# Altium PCB PCB_Button_Board.PcbDoc
Units mil, origin at the board's own origin, x right, y up, seen from the top; angles counter-clockwise.
Board outline 1417.32 x 1023.62 mil, 2 copper layers (Top Layer, Bottom Layer), stack 61.811 mil thick; 41 components, 29 nets, 125 pads, 0 vias.
Unrouted connection lines stored in the file: 87.
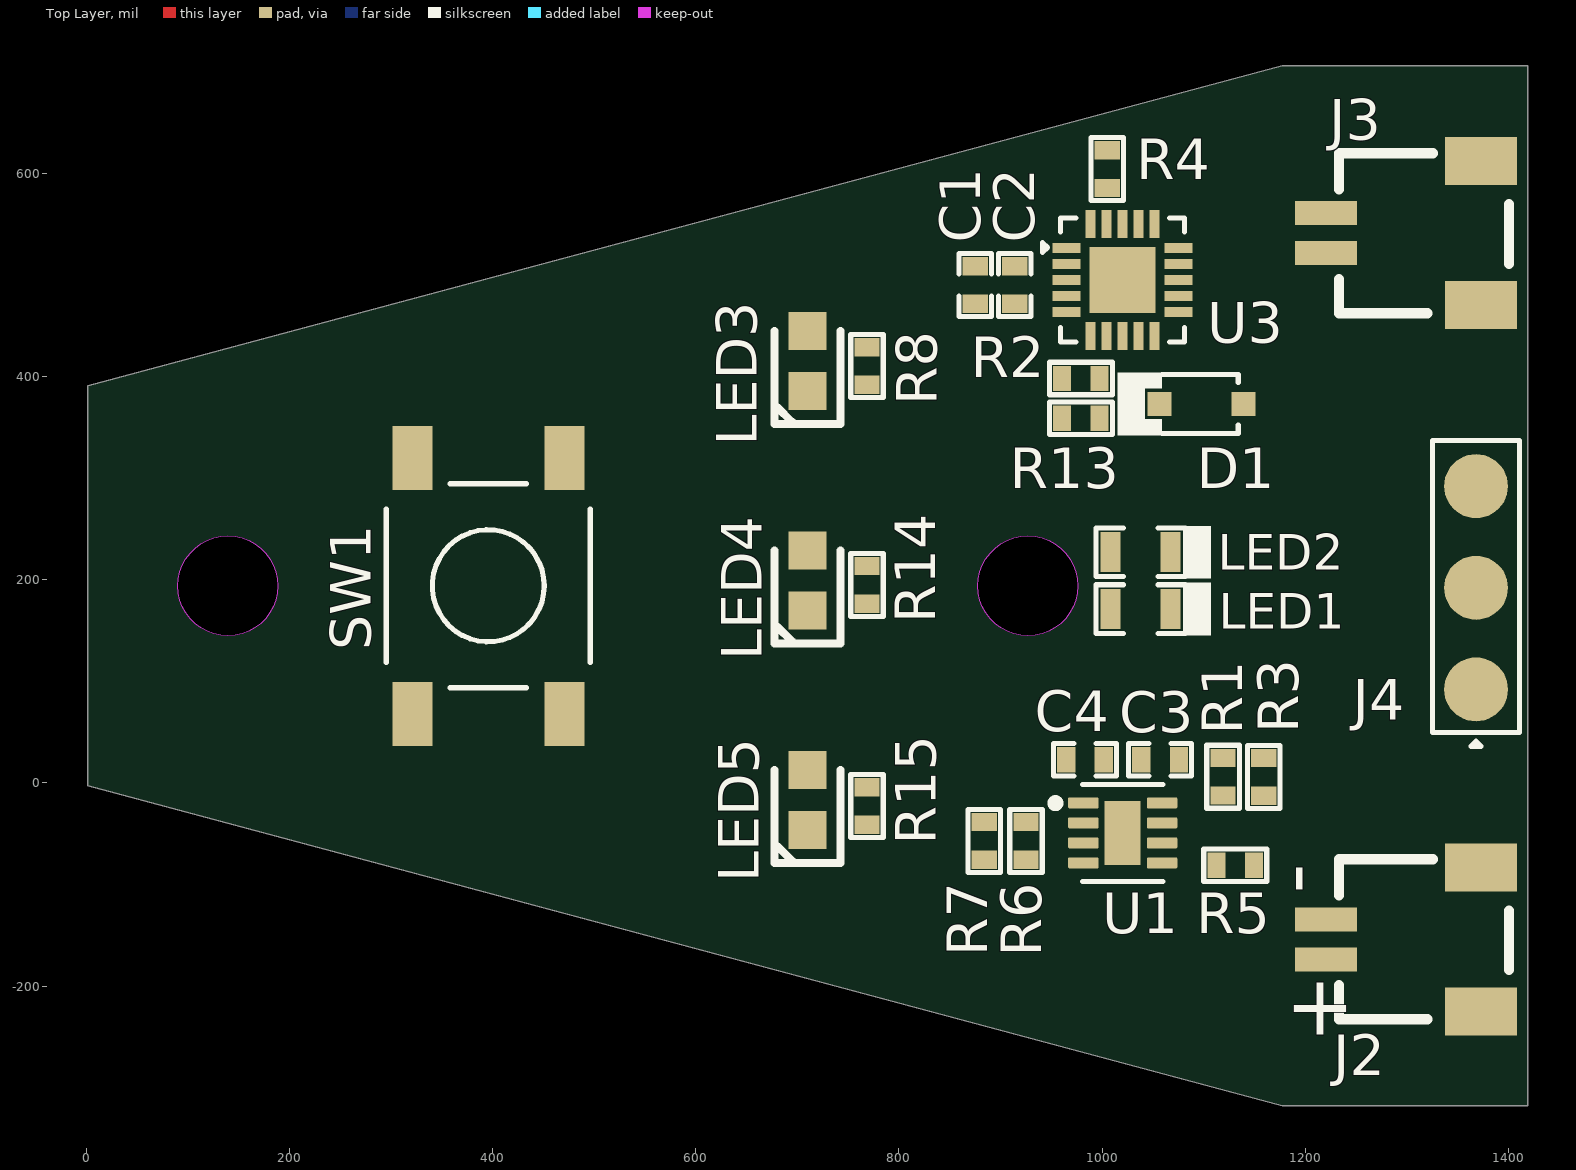
[diagram p0: Top Layer view]
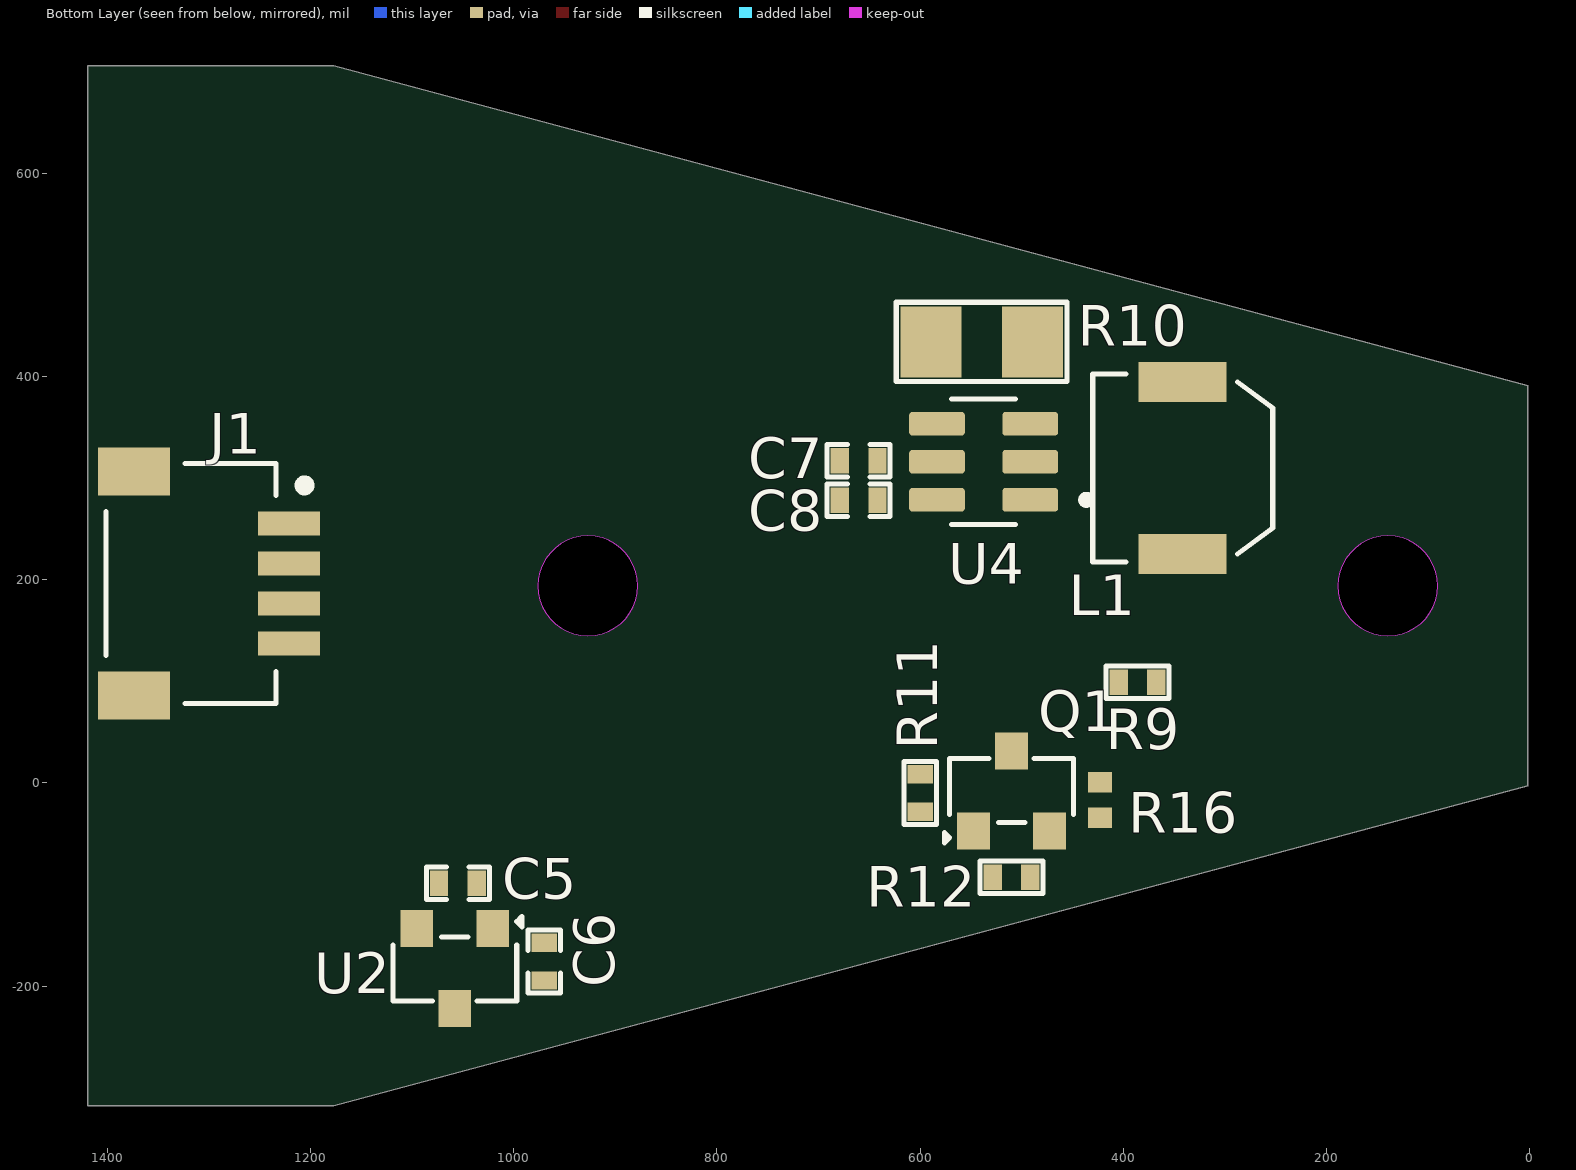
[diagram p1: Bottom Layer view, seen from below]

## Layer stack, top to bottom
Top Solder: solder mask 0.3937, Solder Resist, Dk 3.5
Top Layer: signal copper 1.378
Dielectric 1: core 59.0551, FR-4, Dk 4.8
Bottom Layer: signal copper 1.378
Bottom Solder: solder mask 0.3937, Solder Resist, Dk 3.5

## Board outline
1.76,-3.03 1177.21,-317.99 1419.08,-317.99 1419.08,705.63 1177.21,705.63 1.76,390.67
cut-out: 139.55,144.61 cw(c139.55,193.82) 90.34,193.82 cw(c139.55,193.82) 139.55,243.03 cw(c139.55,193.82) 188.77,193.82 cw(c139.55,193.82)
cut-out: 926.96,144.61 cw(c926.96,193.82) 877.74,193.82 cw(c926.96,193.82) 926.96,243.03 cw(c926.96,193.82) 976.17,193.82 cw(c926.96,193.82)

## Design rules (kind name [scope] priority, off if disabled: settings)
Clearance [All] p1: gap=7 ignorepadtopadclearanceinfootprint=FALSE except(4: Arc-SMDPad Track-SMDPad SMDPad-SMDPad)
HoleSize [All] p1: absolutevalues=TRUE maxlimit=1000 minlimit=1 maxpercent=80.000 minpercent=20.000
HoleToHoleClearance [All] p1: gap=2 allowstackedmicrovias=TRUE
MinimumSolderMaskSliver [All] p1: minsoldermaskwidth=2
PolygonConnect [All] p1: connectstyle=Relief reliefconductorwidth=10 reliefentries=4 polygonreliefangle="90 Angle" airgapwidth=10
RoutingVias [All] p1: holewidth=11.81 width=23.62 viastyle="Through Hole" minholewidth=11.81 minwidth=23.62 maxholewidth=11.81 maxwidth=23.62
SilkToSilkClearance [All] p1: silktosilkclearance=2
SilkToSolderMaskClearance [IsPad] p1: minsilkscreentomaskgap=2 clearancetoexposedcopper=TRUE
SolderMaskExpansion [All] p1: expansion=4 istentingtop=FALSE
Width [All] p1: maxlimit=100 minlimit=10 preferedwidth=12 minimp=50.000000 maximp=50.000000 favimp=50.000000
25 further rules are at their usual default settings.

## Classes and differential pairs
component class U_Power-Sheet: C3 C4 C5 C6 LED1 LED2 R1 R3 R5 R6 R7 U1 U2
component class U_LED-Driver-Sheet: C7 C8 L1 Q1 R9 R10 R11 R12 R16 SW1 U4
component class U_Controller-Sheet: C1 C2 D1 J4 LED3 LED4 LED5 R2 R4 R8 R13 R14 R15 U3
component class U_Connector-Sheet: J1 J2 J3

## Components (designator, comment, footprint, x,y, rotation, side; value= is the part's Value field where it differs from the comment)
C1 "1uF" Cap-0402 875,490 r270 top locked
C2 "0.1uF" Cap-0402 914,490 r270 top locked
C3 "1uF" Cap-0402 1057.06,22.87 r0 top locked
C4 "1uF" Cap-0402 983.06,22.87 r180 top locked
C5 "1uF" Cap-0402 1055,-99 r0 bottom locked
C6 "0.1uF" Cap-0402 970,-176 r270 bottom locked
C7 "0.22uF" Cap-0402 660.5,317 r180 bottom locked
C8 "1uF" Cap-0402 660.5,278 r180 bottom locked
D1 "MM3Z3V3B" SOD323F 1098,373 r180 top locked
J1 "SM04B-SRSS-TB" JST_SM04B-SRSS-TB(LF)(SN) 1221,196.32 r270 bottom
J2 "SM02B-SRSS-TB(LF)(SN)" SM02B-SRSS-TB(LF)(SN) 1298,-154 r90 top locked
J3 "SM02B-SRSS-TB(LF)(SN)" SM02B-SRSS-TB(LF)(SN) 1298,541 r90 top locked
J4 "3 Pin POGO" "3 Pin POGO" 1368,192 r90 top locked
L1 "22uH" IND_1235AS-H-220M=P3 341.5,310 r270 bottom locked
LED1 "RED" LED-0603 1038,171 r0 top locked
LED2 "Emerald" LED-0603 1038,227 r0 top locked
LED3 "GREEN" 150060GS75000 710,415 r90 top locked
LED4 "GREEN" 150060GS75000 710,199 r90 top locked
LED5 "GREEN" 150060GS75000 710,-17 r90 top locked
Q1 "FDN335N" SOT-23 510,-8 r180 bottom locked
R1 "10K" Res-0402 1119,6 r270 top locked
R2 "27K" Res-0402 979,398 r0 top locked
R3 "10K" Res-0402 1159.06,5.87 r270 top locked
R4 "4.7K" Res-0402 1005,604 r90 top locked
R5 "27K" Res-0402 1131,-81 r180 top locked
R6 "750R" Res-0402 925.06,-57.13 r90 top locked
R7 "10K" Res-0402 884.06,-57.13 r90 top locked
R8 "100R" Res-0402 768.57,410.35 r270 top locked
R9 "10K" Res-0402 386,99 r180 bottom locked
R10 "0.4R" Res-1206 539.5,434 r180 bottom locked
R11 "1K" Res-0402 600,-10 r270 bottom locked
R12 "10K" Res-0402 510,-93 r180 bottom locked
R13 "7.68K" Res-0402 979,359 r180 top locked
R14 "100R" Res-0402 768.57,194.85 r270 top locked
R15 "100R" Res-0402 768.57,-22.72 r270 top locked
R16 "20R" RESC1005X40N 423,-17 r270 bottom locked
SW1 "PTS526 SK15 SMTR2 LFS" PTS525SM15SMTR2LFS 395.8,193.98 r90 top locked
U1 "BQ25170DSGR" BQ25170DSGR 1020.28,-49.28 r0 top locked
U2 "MCP1700T-3302E/TT" SOT-23 1058,-182.63 r0 bottom locked
U3 "ATTINY1616-MNR" "20-VQFN (3x3)" 1020.12,495 r0 top locked
U4 "AP3019AKTR-G1" AP3019AKTR-G1 537.5,316 r0 bottom locked

## Footprints (in the part's own frame and the unit in brackets; to place one, negate y for a bottom-side part, rotate by r counter-clockwise, add the part's x,y. Pads: shape width x height; smd on the part's side, far side on the other; paste and mask are expansions set on the pad)
"3 Pin POGO" [mm] "Connector; Header; 3 Position"
  round 1.6 smd: 1(-2.54,0) 2(0,0) 3(2.54,0)
  silkscreen extent -3.96,-1.09 3.68,1.09
"20-VQFN (3x3)" [mm]
  rect 0.7x0.25 smd: 1(-1.4,0.8) 2(-1.4,0.4) 3(-1.4,0) 4(-1.4,-0.4) 5(-1.4,-0.8) 11(1.4,-0.8) 12(1.4,-0.4) 13(1.4,0) 14(1.4,0.4) 15(1.4,0.8)
  rect 0.25x0.7 smd: 6(-0.8,-1.4) 7(-0.4,-1.4) 8(0,-1.4) 9(0.4,-1.4) 10(0.8,-1.4) 16(0.8,1.4) 17(0.4,1.4) 18(0,1.4) 19(-0.4,1.4) 20(-0.8,1.4)
  rect 1.65x1.65 smd: 21(0,0)
  silkscreen extent -2.01,-1.55 1.55,1.55, body extent -1.5,-1.5 1.5,1.5, height 0.59
150060GS75000 [mm]
  rect 0.95x0.95 smd: 1(-0.75,0) 2(0.75,0)
  silkscreen extent -1.58,-0.82 0.75,0.82, body extent -0.8,-0.4 0.8,0.4, height 0.81
AP3019AKTR-G1 [mm]
  rrect25% 1.39x0.59 smd: 1(-1.165,0.95) 2(-1.165,0) 3(-1.165,-0.95) 4(1.165,-0.95) 5(1.165,0) 6(1.165,0.95)
  silkscreen extent -2.66,-1.57 0.8,1.57, body extent -1.37,-1.49 1.48,1.51, height 1.31
BQ25170DSGR [mm]
  rrect25% 0.76x0.28 smd: 1(-0.985,0.75) 2(-0.985,0.25) 3(-0.985,-0.25) 4(-0.985,-0.75) 5(0.985,-0.75) 6(0.985,-0.25) 7(0.985,0.25) 8(0.985,0.75)
  rect 0.9x1.6 smd paste-2: 9(0,0)
  silkscreen extent -1.78,-1.21 1,1.21, body extent -1,-1 1,1, height 0.8
Cap-0402 [mil]
  rect 18x25 smd mask+2.36: 1(-18.5,0) 2(18.5,0)
  silkscreen extent -31,-16 31,16, body extent -20,-10 20,10, height 19
IND_1235AS-H-220M=P3 [mm]
  rect 1x2.2 smd: 1(-2.15,0) 2(2.15,0)
  silkscreen extent -2.35,-2.25 2.35,2.25, body extent -2.35,-2.29 2.35,2.21, height 1.79
JST_SM04B-SRSS-TB(LF)(SN) [mm]
  rect 0.6x1.55 smd: 1(-1.5,0) 2(-0.5,0) 3(0.5,0) 4(1.5,0)
  rect 1.2x1.8 smd: S1(-2.8,-3.875) S2(2.8,-3.875)
  silkscreen extent -3,-4.57 3,0.48, body extent -2.92,-4.57 3.08,0.38, height 2.91
LED-0603 [mm]
  rect 0.5x1 smd: 1(-0.75,0) 2(0.75,0)
  silkscreen extent -1.12,-0.66 1.75,0.66, body extent -0.82,-0.37 0.82,0.36, height 0.68
PTS525SM15SMTR2LFS [mm]
  rect 1.6x1 smd: 1(-3.2,1.9) 2(3.2,1.9) 3(-3.2,-1.9) 4(3.2,-1.9)
  silkscreen extent -2.55,-2.55 2.55,2.55, body extent -3.2,-2.55 3.2,2.55, height 1.6
Res-0402 [mil]
  rect 18x25 smd mask+2.17: 1(-18.5,0) 2(18.5,0)
  silkscreen extent -32,-17 32,16, body extent -23,-11 23,11, height 16
Res-1206 [mil]
  rect 60x70 smd: 1(-50,0) 2(50,0)
  silkscreen extent -84,-39 84,39, body extent -63,-31 63,31, height 24
RESC1005X40N [mm]
  rect 0.51x0.6 smd: 1(-0.445,0) 2(0.445,0)
  body extent -0.5,-0.25 0.5,0.25, height 0.41
SM02B-SRSS-TB(LF)(SN) [mm]
  rect 0.6x1.55 smd: 1(-0.5,1.975) 2(0.5,1.975)
  rect 1.2x1.8 smd: 3(-1.8,-1.9) 4(1.8,-1.9)
  silkscreen extent -2,-2.6 2,1.65, body extent -2,-2.73 2,2.22, height 2.91
SOD323F [mm]
  rect 0.6x0.6 smd: 1(-1.05,0) 2(1.05,0)
  silkscreen extent -0.91,-0.79 2.11,0.79, body extent -1.25,-0.68 1.25,0.68, height 1
SOT-23 [mm] "TRANS NPN 40V 0.6A SOT23"
  rect 0.82x0.92 smd: 1(-0.95,-1) 2(0.95,-1) 3(0,1)
  silkscreen extent -1.68,-1.3 1.55,0.81, body extent -1.5,-1.25 1.5,1.25, height 1.05

## Part data
C1 C3 C4 C5 C8: library part GRM033R60J105MEA2D, "1 µF ±20% 6.3V Ceramic Capacitor X5R 0201 (0603 Metric)", Digikey Part Number=490-7229-6-ND, Manufacturer="Murata Electronics", Package=0201, ComponentLink1Description="Digikey Link", ComponentLink1URL=https://www.digikey.com/en/products/detail/murata-electronics/GRM033R60J105MEA2D/4213369, Item Type=Capacitor, Manufacturer Part Number=GRM033R60J105MEA2D
C2 C6: library part GRM155R71C104KA88J, "0.1 µF ±10% 16V Ceramic Capacitor X7R 0402 (1005 Metric)", Digikey Part Number=490-6328-6-ND, Manufacturer="Murata Electronics", Package=0402, ComponentLink1Description="Digikey Link", ComponentLink1URL=https://www.digikey.com/en/products/detail/murata-electronics/GRM155R71C104KA88J/2610892, Item Type=Capacitor, Manufacturer Part Number=GRM155R71C104KA88J
C7: library part CC0402KRX5R8BB224, "0.22 µF ±10% 25V Ceramic Capacitor X5R 0402 (1005 Metric)", Digikey Part Number=311-3341-6-ND, Manufacturer=YAGEO, Package=0402, ComponentLink1Description="Digikey Link", ComponentLink1URL=https://www.digikey.com/en/products/detail/yageo/CC0402KRX5R8BB224/5883337?s=N4IgTCBcDaIMJwAwBZFgNICUAaBWTAHAEJFhjIgC6AvkA, Item Type=Capacitor, Manufacturer Part Number=CC0402KRX5R8BB224
D1: "DIODE ZENER 3.3V 200MW SOD323F", Digikey Part Number=MM3Z3V3BDKR-ND, Forward Voltage=1V, Manufacturer="ON Semiconductor / Fairchild", Max Operating Temperature=150°C, Max Power Dissipation=200mW, Max Reverse Leakage Current=4.5uA, Min Operating Temperature=-65°C, Package Quantity=1, Supplier Part Number 1=MM3Z3V3BCT-ND, Test Current=5mA, Tolerance=2%, Working Voltage=3.3V, ComponentLink1Description=http://www.onsemi.com/pub/Collateral/MM3Z9V1B-D.pdf?src-supplier=Digi-Key, ComponentLink1URL=http://www.onsemi.com/pub/Collateral/MM3Z9V1B-D.pdf?src-supplier=Digi-Key, ComponentLink2Description=http://www.mouser.com/ds/2/149/MM3Z3V3B-187166.pdf?src-supplier=Mouser, ComponentLink2URL=http://www.mouser.com/ds/2/149/MM3Z3V3B-187166.pdf?src-supplier=Mouser, ComponentLink3Description=https://www.fairchildsemi.com/datasheets/MM/MM3Z9V1B.pdf?src-supplier=Avnet, ComponentLink3URL=https://www.fairchildsemi.com/datasheets/MM/MM3Z9V1B.pdf?src-supplier=Avnet, ComponentLink4Description=http://www.farnell.com/datasheets/1706525.pdf?src-supplier=Element14, ComponentLink4URL=http://www.farnell.com/datasheets/1706525.pdf?src-supplier=Element14, ComponentLink5Description="Digikey Link", ComponentLink5URL=https://www.digikey.com/en/products/detail/onsemi/MM3Z3V3B/1626765?s=N4IgTCBcDaILJwMwC1EDVECEQF0C%2BQA, Element Configuration=Single, Height=1mm, Impedance=89R, Item Type=Diode, Lead Free="Lead Free", Length=1.3mm, Manufacturer Part Number=MM3Z3V3B, Mount="Surface Mount", Number of Pins=2, Packaging="Tape and Reel", Peak Reverse Current=4.5uA, Power Dissipation=200mW, Pricing 1="1=0.22, 10=0.18, 100=0.0956, 500=0.06288, 1000=0.04276 (USD)", Radiation Hardening=No, REACH SVHC="No SVHC", Stock 1=473644, Supplier 1=Digi-Key, Voltage Tolerance=2%, Weight=0.0276g, Width=1.7mm, Zener Voltage=3.3V
J1: "Connector Header Surface Mount, Right Angle 4 position 0.039\" (1.00mm)", Digikey Part Number=455-SM04B-SRSS-TBDKR-ND, Manufacturer="JST Sales America Inc.", Package=SMD, ComponentLink1Description="Digikey Link", ComponentLink1URL=https://www.digikey.com/en/products/detail/jst-sales-america-inc/SM04B-SRSS-TB/926710, Item Type=Connector, Manufacturer Part Number=SM04B-SRSS-TB
J2 J3: "Connector Header Surface Mount, Right Angle 2 position 0.039 _1.00mm_", Digikey Part Number=455-SM02B-SRSS-TBDKR-ND, Manufacturer="JST Sales", Manufacturer Part Number=SM02B-SRSS-TB_LF__SN_, Package=None, Availability=Unavailable, ComponentLink1Description="Digikey Link", ComponentLink1URL=https://www.digikey.com/en/products/detail/jst-sales-america-inc/SM02B-SRSS-TB/926708?s=N4IgTCBcDaIMoFkAMYBCBaOAlOd0BVUQBdAXyA, Price=None, SnapEDA_Link=https://www.snapeda.com/parts/SM02B-SRSS-TB%28LF%29%28SN%29/JST%20Sales%20America%20Inc./view-part/447499/?ref=snap
J4: library part 68000-103HLF, "CONN HEADER VERT 3POS 2.54MM", Current Rating=3A, Digikey Part Number=609-3461-ND, Flammability Rating="UL94 V-0", Housing Color=Black, Insulation Resistance=5GR, LCSC Part Number=C168677, Max Operating Temperature=125°C, Max Voltage Rating (AC)=1.5kV, Min Operating Temperature=-65°C, Package Quantity=100, Supplier Part Number=88K1775, Category="Headers and Wire Housings", ComponentLink1Description=LCSC, ComponentLink2Description=https://datasheet.ciiva.com/46392/1914865-46392021.pdf?src-supplier=Element14, ComponentLink2URL=https://datasheet.ciiva.com/46392/1914865-46392021.pdf?src-supplier=Element14, ComponentLink3Description="Digikey Link", ComponentLink3URL=https://www.digikey.com/en/products/detail/amphenol-cs-fci/68000-103HLF/2023309?s=N4IgTCBcDaIGwA4AMKC0BGJBmAEgGQDEQBdAXyA, Contact Gender=Male, Contact Material=Bronze, Contact Mating Length=5.84mm, Contact Plating=Gold,GXT, Contact Post Length=2.41mm, Depth=2.41mm, Housing Material=Thermoplastic, Item Type="Male Header", Length=7.62mm, Manufacturer Part Number=68000-103HLF, Number of Contacts=3, Number of Positions=3, Number of Rows=1, Orientation=Straight, Packaging=Bulk, Pitch=2.54mm, Pricing="1=0.395, 10=0.31, 25=0.29, 50=0.27, 100=0.25 (USD)", Radiation Hardening=No, Reach SVHC Compliant=No, RoHS=No, Series=68000, Stock=2805, Supplier=Avnet, Termination="Through Hole", Voltage Rating=1.5kV
L1: library part 1235AS-H-220M=P3, "Inductor Power Shielded Wirewound 22uH 20% 100KHz Ferrite 1A 0.306Ohm DCR 1818 T/R", Digikey Part Number=490-14209-6-ND, Manufacturer="Murata Electronics", Manufacturer Part Number=1235AS-H-220M=P3, Package=None, ComponentLink1Description="Digikey Link", ComponentLink1URL=https://www.digikey.com/en/products/detail/murata-electronics/1235AS-H-220M-P3/6205726, Item Type=Inductor
LED1: library part NCD0603R3, "RED LED 0603 Light Emitting Diodes", LCSC Part Number=C3151730, Manufacturer="Foshan NationStar Optoelectronics", Package=0603, ComponentLink1Description=LCSC, ComponentLink1URL=https://www.lcsc.com/product-detail/Light-Emitting-Diodes-LED_Foshan-NationStar-Optoelectronics-NCD0603R3_C3151730.html, Item Type=LED, Manufacturer Part Number=NCD0603R3
LED2: library part NCD0603G2, "Emerald 0603 Light Emitting Diodes (LED) ROHS", LCSC Part Number=C87326, Manufacturer="Foshan NationStar Optoelectronics", Package=0603, ComponentLink1Description=LCSC, ComponentLink1URL=https://www.lcsc.com/product-detail/Light-Emitting-Diodes-LED_Foshan-NationStar-Optoelectronics-NCD0603G2_C87326.html, Item Type=LED, Manufacturer Part Number=NCD0603G2
LED3 LED4 LED5: library part 150060GS75000, "Green 520nm LED Indication - Discrete 3.2V 0603 (1608 Metric)", Digikey Part Number=732-4971-6-ND, Manufacturer="Würth Elektronik", Package=0603, ComponentLink1Description="Digikey Link", ComponentLink1URL=https://www.digikey.com/en/products/detail/w%C3%BCrth-elektronik/150060GS75000/4489898, Item Type=LED, Manufacturer Part Number=150060GS75000, Supplier Part Number=732-4971-6-ND
Q1: "SOT-23 MOSFETs ROHS", Digikey Part Number=FDN335NDKR-ND, Manufacturer=onsemi, Package=SOT-23, ComponentLink1Description="Digikey Link", ComponentLink1URL=https://www.digikey.com/en/products/detail/onsemi/FDN335N/965301, Item Type=Mosfet, Manufacturer Part Number=FDN335N
R1 R3 R7 R9 R12: library part RC0603FR-0710KL, "10 kOhms ±1% 0.063W, 1/16W Chip Resistor 0402 (1005 Metric) Moisture Resistant Thick Film", Digikey Part Number=311-10.0KLRDKR-ND, Manufacturer=YAGEO, Manufacturer Part Number=RC0402FR-0710KL, Package=0402, ComponentLink1Description="Digikey Link", ComponentLink1URL=https://www.digikey.com/en/products/detail/yageo/RC0402FR-0710KL/726523, Item Type=Resistor
R2 R5: library part RC0402FR-0727KL, "27 kOhms ±1% 0.063W, 1/16W Chip Resistor 0402 (1005 Metric) Moisture Resistant Thick Film", Digikey Part Number=311-27.0KLRDKR-ND, Manufacturer=YAGEO, Package=0402, ComponentLink1Description="New link", Item Type=Resistor, Manufacturer Part Number=RC0402FR-0727KL
R4: library part RC0402FR-074K7L, "4.7 kOhms ±1% 0.063W, 1/16W Chip Resistor 0402 (1005 Metric) Moisture Resistant Thick Film", Digikey Part Number=311-4.7KLRDKR-ND, Manufacturer=YAGEO, Package=0402, ComponentLink1Description="Digikey Link", ComponentLink1URL=https://www.digikey.com/en/products/detail/yageo/RC0402FR-074K7L/2827563, Item Type=Resistor, Manufacturer Part Number=RC0402FR-074K7L
R6: library part CRCW0201750RFKED, "750 Ohms ±5% 0.063W, 1/16W Chip Resistor 0402 (1005 Metric) Moisture Resistant Thick Film", Digikey Part Number=YAG3314DKR-ND, Manufacturer=YAGEO, Manufacturer Part Number=RC0402JR-07750RL, Package=0402, ComponentLink1Description="Digikey Link", ComponentLink1URL=https://www.lcsc.com/product-detail/Chip-Resistor-Surface-Mount_Vishay-Intertech-CRCW0201750RFKED_C2086853.html, Item Type=Resistor
R8 R14 R15: library part RC0402FR-07100RL, "100 Ohms ±1% 0.063W, 1/16W Chip Resistor 0402 (1005 Metric) Moisture Resistant Thick Film", Digikey Part Number=311-100LRDKR-ND, Manufacturer=YAGEO, Package=0402, ComponentLink1Description="Digikey Link", ComponentLink1URL=https://www.digikey.com/en/products/detail/yageo/RC0402FR-07100RL/726527, Item Type=Resistor, Manufacturer Part Number=RC0402FR-07100RL
R10: library part RL1206FR-070R4L, "400 mOhms ±1% 0.25W, 1/4W Chip Resistor 1206 (3216 Metric) Automotive AEC-Q200, Current Sense, Moisture Resistant Thick Film", Digikey Part Number=311-.4LWDKR-ND, Manufacturer=YAGEO, Package=1206, ComponentLink1Description="Digikey Link", ComponentLink1URL=https://www.digikey.com/en/products/detail/yageo/RL1206FR-070R4L/3886028, Item Type=Resistor, Manufacturer Part Number=RL1206FR-070R4L
R11: library part RC0402FR-071KL, "1 kOhms ±1% 0.063W, 1/16W Chip Resistor 0402 (1005 Metric) Moisture Resistant Thick Film", Digikey Part Number=311-1.00KLRDKR-ND, Manufacturer=YAGEO, Package=0402, ComponentLink1Description="Digikey Link", ComponentLink1URL=https://www.digikey.com/en/products/detail/yageo/RC0402FR-071KL/726513, Item Type=Resistor, Manufacturer Part Number=RC0402FR-071KL
R13: library part AC0402FR-077K68L, "7.68 kOhms ±1% 0.063W, 1/16W Chip Resistor 0402 (1005 Metric) Automotive AEC-Q200, Moisture Resistant Thick Film", Digikey Part Number=YAG5688DKR-ND, Manufacturer=YAGEO, Package=0402, ComponentLink1Description="New link", Item Type=Resistor, Manufacturer Part Number=AC0402FR-077K68L
R16: library part RCS040220R0FKED, "20 Ohms ±1% 0.2W, 1/5W Chip Resistor 0402 (1005 Metric) Automotive AEC-Q200, Pulse Withstanding Thick Film", Digikey Part Number=541-RCS040220R0FKEDDKR-ND, Manufacturer="Vishay Dale", Package=0402, ComponentLink1Description="Digikey Link", ComponentLink1URL=https://www.digikey.com/en/products/detail/vishay-dale/RCS040220R0FKED/5867510, Item Type=Resistor, Manufacturer Part Number=RCS040220R0FKED
SW1: library part MCSLPT4644B1PHTR, "Tactile Switch SPST-NO Top Actuated Surface Mount", Digikey Part Number=450-3383-6-ND, Manufacturer="TE Connectivity ALCOSWITCH Switches", Package=SMD, ComponentLink1Description="Digikey Link", ComponentLink1URL=https://www.digikey.com/en/products/detail/te-connectivity-alcoswitch-switches/MCSLPT4644B1PHTR/9686564, Item Type=Switch, Manufacturer Part Number=MCSLPT4644B1PHTR
U1: "Charger IC Multi-Chemistry 8-WSON (2x2)", Digikey Part Number=296-BQ25170DSGRDKR-ND, Manufacturer="Texas Instruments", Package="8-WFDFN Exposed Pad", ComponentLink1Description="Digikey Link", ComponentLink1URL=https://www.digikey.com/en/products/detail/texas-instruments/BQ25170DSGR/14124032, Item Type="BATTERY CHARGER", Manufacturer Part Number=BQ25170DSGR
U2: "IC REG LDO 3.3V 0.25A SOT23-3", Case/Package=SOT-23, Digikey Part Number=MCP1700T3302ETTDKR-ND, Dropout Voltage=178mV, Input Bias Current=1.6uA, Manufacturer=Microchip, Max Input Voltage=6V, Max Operating Temperature=125°C, Max Output Current=250mA, Max Output Voltage=3.3V, Max Power Dissipation=369.6mW, Min Input Voltage=2.3V, Min Operating Temperature=-40°C, Nominal Supply Current=4uA, Output Voltage Accuracy=2%, Package Quantity=3000, Supplier Part Number 1=MCP1700T3302ETTCT-ND, Accuracy=2%, Category="Voltage Regulators - Linear", ComponentLink1Description=https://datasheet.ciiva.com/5801/1784514-5801824.pdf?src-supplier=Farnell, ComponentLink1URL=https://datasheet.ciiva.com/5801/1784514-5801824.pdf?src-supplier=Farnell, ComponentLink2Description=https://datasheet.ciiva.com/2040/21826b-2040112.pdf?src-supplier=Digi-Key, ComponentLink2URL=https://datasheet.ciiva.com/2040/21826b-2040112.pdf?src-supplier=Digi-Key, ComponentLink3Description=https://datasheet.ciiva.com/7649/1784514-7649813.pdf?src-supplier=Element14, ComponentLink3URL=https://datasheet.ciiva.com/7649/1784514-7649813.pdf?src-supplier=Element14, ComponentLink4Description=https://datasheet.ciiva.com/22710/1784514-22710988.pdf?src-supplier=Element14, ComponentLink4URL=https://datasheet.ciiva.com/22710/1784514-22710988.pdf?src-supplier=Element14, ComponentLink5Description=https://datasheet.ciiva.com/14150/mcp1700-eng-tds-14150122.pdf?src-supplier=Distrelec, ComponentLink5URL=https://datasheet.ciiva.com/14150/mcp1700-eng-tds-14150122.pdf?src-supplier=Distrelec, ComponentLink6Description=https://datasheet.ciiva.com/8041/1784514-8041598.pdf?src-supplier=Element14, ComponentLink6URL=https://datasheet.ciiva.com/8041/1784514-8041598.pdf?src-supplier=Element14, ComponentLink7Description=https://datasheet.ciiva.com/3224/jp011779-3224133.pdf?src-supplier=Avnet, ComponentLink7URL=https://datasheet.ciiva.com/3224/jp011779-3224133.pdf?src-supplier=Avnet, ComponentLink8Description=https://datasheet.ciiva.com/16208/filehandler-aspxddocname-en011779-16208911.pdf?src-supplier=Future+Electronics, ComponentLink8URL=https://datasheet.ciiva.com/16208/filehandler-aspxddocname-en011779-16208911.pdf?src-supplier=Future+Electronics, ComponentLink9Description=https://datasheet.ciiva.com/15200/getdatasheetpartid-453599-15200229.pdf?src-supplier=Verical, ComponentLink9URL=https://datasheet.ciiva.com/15200/getdatasheetpartid-453599-15200229.pdf?src-supplier=Verical, ComponentLink10Description=https://datasheet.ciiva.com/2040/21826b-2040113.pdf?src-supplier=Digi-Key, ComponentLink10URL=https://datasheet.ciiva.com/2040/21826b-2040113.pdf?src-supplier=Digi-Key, ComponentLink11Description=https://datasheet.ciiva.com/2040/21826b-2040114.pdf?src-supplier=Digi-Key, ComponentLink11URL=https://datasheet.ciiva.com/2040/21826b-2040114.pdf?src-supplier=Digi-Key, ComponentLink12Description=https://datasheet.ciiva.com/29305/651414-da-01-en-ic-reg-ld-mcp1700t-3302e-tt-sot-23-3-mcp-29305258.pdf?src-supplier=Conrad, ComponentLink12URL=https://datasheet.ciiva.com/29305/651414-da-01-en-ic-reg-ld-mcp1700t-3302e-tt-sot-23-3-mcp-29305258.pdf?src-supplier=Conrad, Contact Plating=Tin,Matte, Height=0.95mm, Item Type=IC, Lead Free="Lead Free", Length=2.9mm, Manufacturer Part Number=MCP1700T-3302E/TT, Max Supply Voltage=6V, Min Output Voltage=3.3V, Min Supply Voltage=2.3V, Mount="Surface Mount", Nominal Output Voltage=3.3V, Number of Outputs=1, Number of Pins=3, Output Current=250mA, Output Type=Fixed, Output Voltage=3.3V, Packaging="Tape and Reel", Polarity=Positive, Power Dissipation=369.6mW, Pricing 1="1=0.50000, 25=0.42400, 100=0.37500 (USD)", Quiescent Current=4uA, Radiation Hardening=No, Reach SVHC Compliant="No SVHC", RoHS=Yes, RoHS Compliant=Yes, Stock 1=230029, Supplier 1=Digi-Key, Supply Current=4uA, Termination=SMD/SMT, Width=1.3mm
U3: "AVR tinyAVR™ 1, Functional Safety (FuSa) Microcontroller IC 8-Bit 20MHz 16KB (16K x 8) FLASH 20-VQFN (3x3)", Digikey Part Number=ATTINY1616-MNRDKR-ND, Manufacturer="Microchip Tech", Package=QFN-20-EP(3x3), ComponentLink1Description="Digikey Link", ComponentLink1URL=https://www.digikey.com/en/products/detail/microchip-technology/ATTINY1616-MNR/7354618?s=N4IgTCBcDaIIIBUEEkByBNAjANhwWgFlUAlEAXQF8g, Item Type=IC, Manufacturer Part Number=ATTINY1616-MNR
U4: "LED Driver IC 1 Output DC DC Regulator Step-Up (Boost) PWM Dimming 550mA (Switch) SOT-23-6", Digikey Part Number=AP3019AKTR-G1DIDKR-ND, Manufacturer="Diodes Incorporated", Package=SOT-23-6, ComponentLink1Description="Digikey Link", ComponentLink1URL=https://www.digikey.com/en/products/detail/diodes-incorporated/AP3019AKTR-G1/4470850?s=N4IgTCBcDaIIIAUDMAGAjATjgaQCoCUBaAcTRAF0BfIA, Item Type="LED Driver", Manufacturer Part Number=AP3019AKTR-G1, Supplier Part Number=AP3019AKTR-G1DIDKR-ND

## Nets (pads, with @x,y where several pads share a name; then routed paths per layer and width w, separated by ;. In a path a pad name is that pad's centre, name@x,y a point inside that pad or via, vN(x,y) a via of type N, cw(c..) or ccw(c..) an arc to the next point about the centre after c; other vN are vias at no path point)
25%: LED5.1 U3.5
50%: LED4.1 U3.1
75%: LED3.1 U3.20
+3V3: C1.2 C2.2 C5.2 J1.3 J4.1 R9.1 U2.2 U3.4
BATT_LVL: D1.2 R2.2 R13.1 U3.7
BUTTON: R9.2 SW1.1 SW1.2 U3.17
CTRL_Signal: U3.16 U4.4
GND: C1.1 C2.1 C3.1 C4.1 C5.1 C6.1 C7.1 C8.1 D1.1 J1.S1 J1.S2 J2.2 J2.3 J2.4 J3.2 J3.3 J3.4 J4.3 Q1.2 R2.1 R5.1 R6.1 R7.1 R8.2 R10.1 R12.2 R14.2 R15.2 SW1.3 SW1.4 U1.4 U1.9 U2.1 U3.3 U3.21 U4.2
LED_R_NEG: J1.4 R16.2
LED_W_NEG: J1.2 R10.2 U4.3
LED_W_POS: C7.2 J1.1 U4.5
NetL1_2: L1.2 U4.1
NetLED1_1: LED1.1 R1.2
NetLED2_1: LED2.1 R3.2
NetLED2_2: LED2.2 U1.5
NetLED3_2: LED3.2 R8.1
NetLED4_2: LED4.2 R14.1
NetLED5_2: LED5.2 R15.1
NetQ1_1: Q1.1 R11.2 R12.1
NetQ1_3: Q1.3 R16.1
NetR4_1: R4.1 U3.19
NetR5_2: R5.2 U1.7
NetR6_2: R6.2 U1.2
NetR7_2: R7.2 U1.3
RED_LED: R11.1 U3.15
UPDI: J4.2 R4.2
V_SENSE: LED1.2 U1.6 U3.8
VBATT: C3.2 C6.2 C8.2 J2.1 L1.1 R1.1 R3.1 R13.2 U1.8 U2.3 U4.6
VUSB: C4.2 J3.1 U1.1
pads on no net: U3.2 U3.6 U3.9 U3.10 U3.11 U3.12 U3.13 U3.14 U3.18

## Silkscreen, mask and mechanical layers (free items; w line width, h text height)
Top Overlay:
  text "-" at 1172.01,-109 h60 r270
  text "+" at 1180,-248 h60
Dimensions:
  drawing of 1515 lines, arcs and shapes, not listed
Board Shape:
  circle w10: c139.55,193.82 r49.21
  circle w10: c139.55,193.82 r49.21
  circle w10: c926.96,193.82 r49.21
  lines w10: 926.96,144.61 cw(c926.96,193.82) 926.96,243.03 ; 1.76,-3.03 1177.21,-317.99 1419.08,-317.99 1419.08,705.63 1177.21,705.63 1.76,390.67 1.76,-3.03